# Altium PCB Pcb.PcbDoc (part 1 of 2)
Units mm, origin at the board's own origin, x right, y up, seen from the top; angles counter-clockwise.
Board outline 99.85 x 75.77 mm, 2 copper layers (Top Layer, Bottom Layer); 30 components, 145 nets, 485 pads, 129 vias.
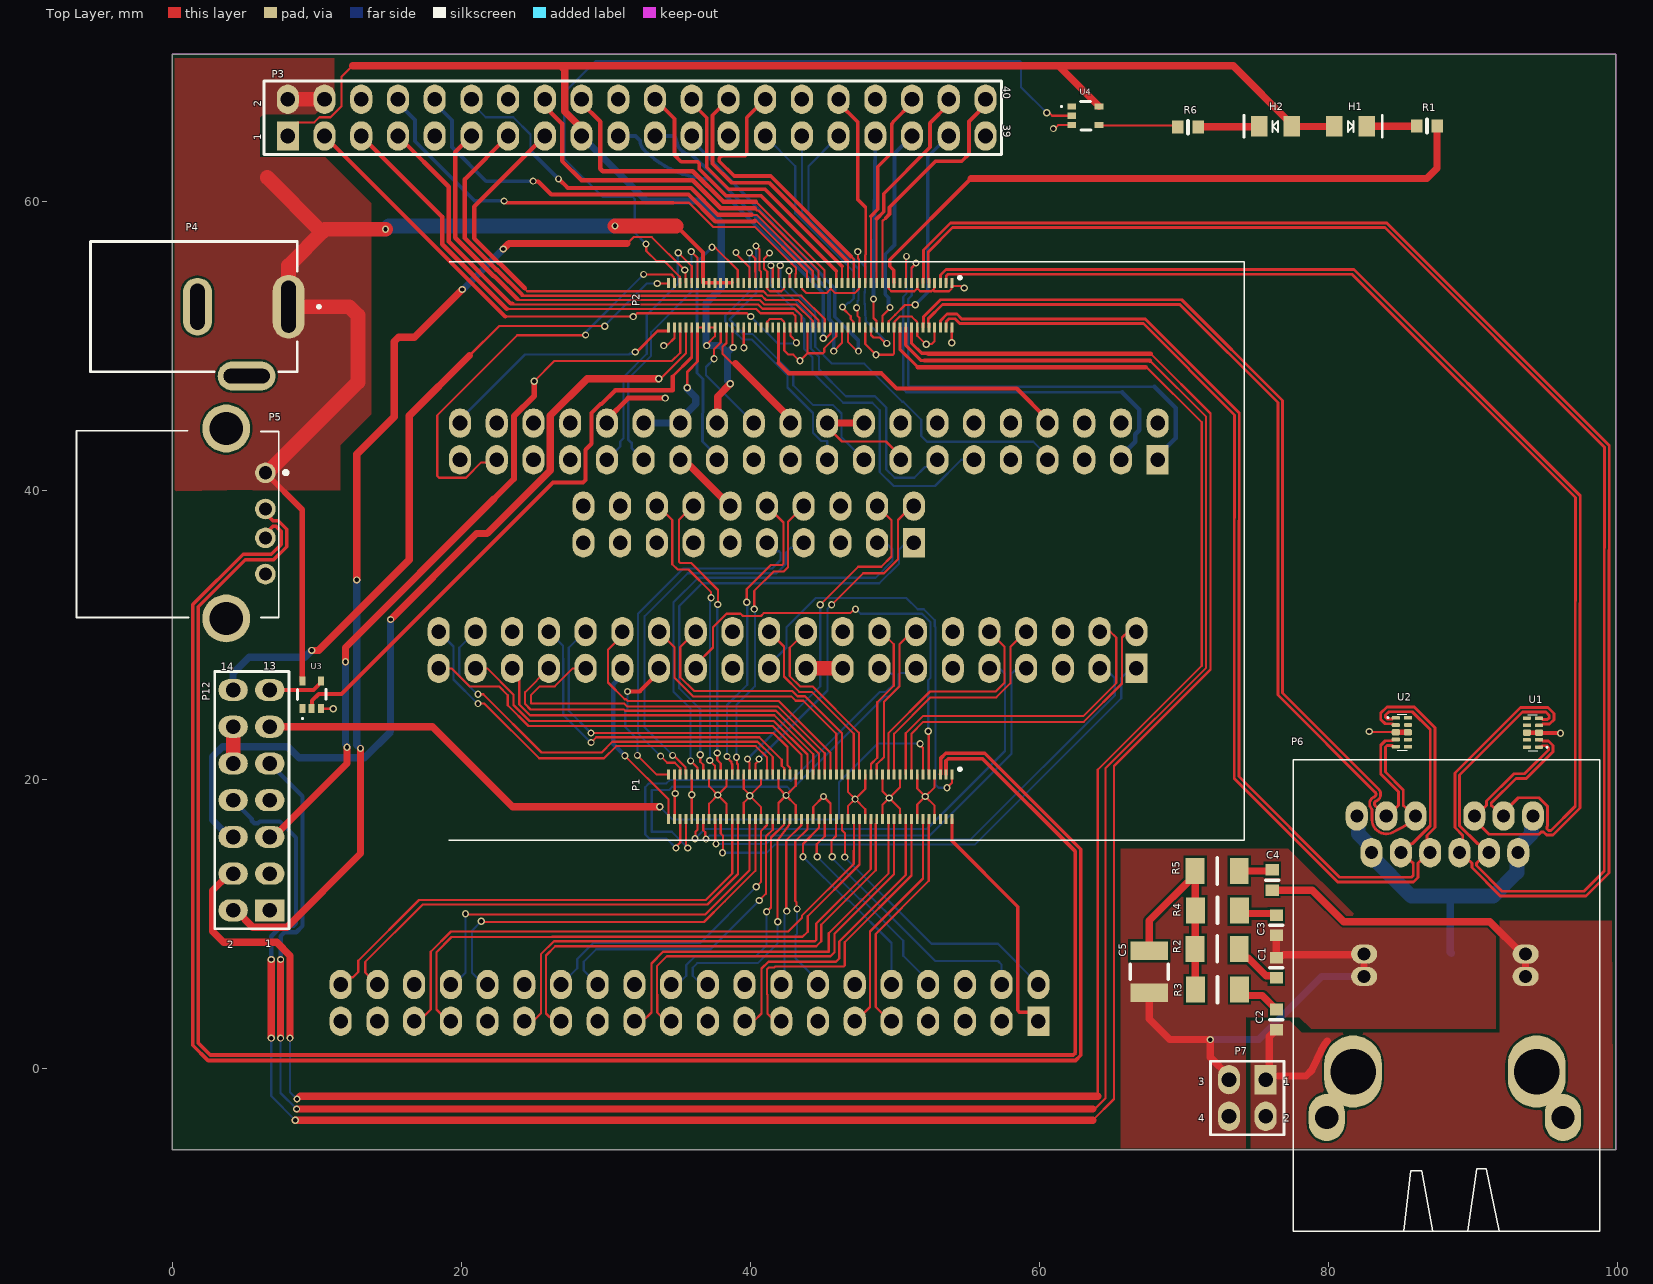
[diagram p0: Top Layer view]
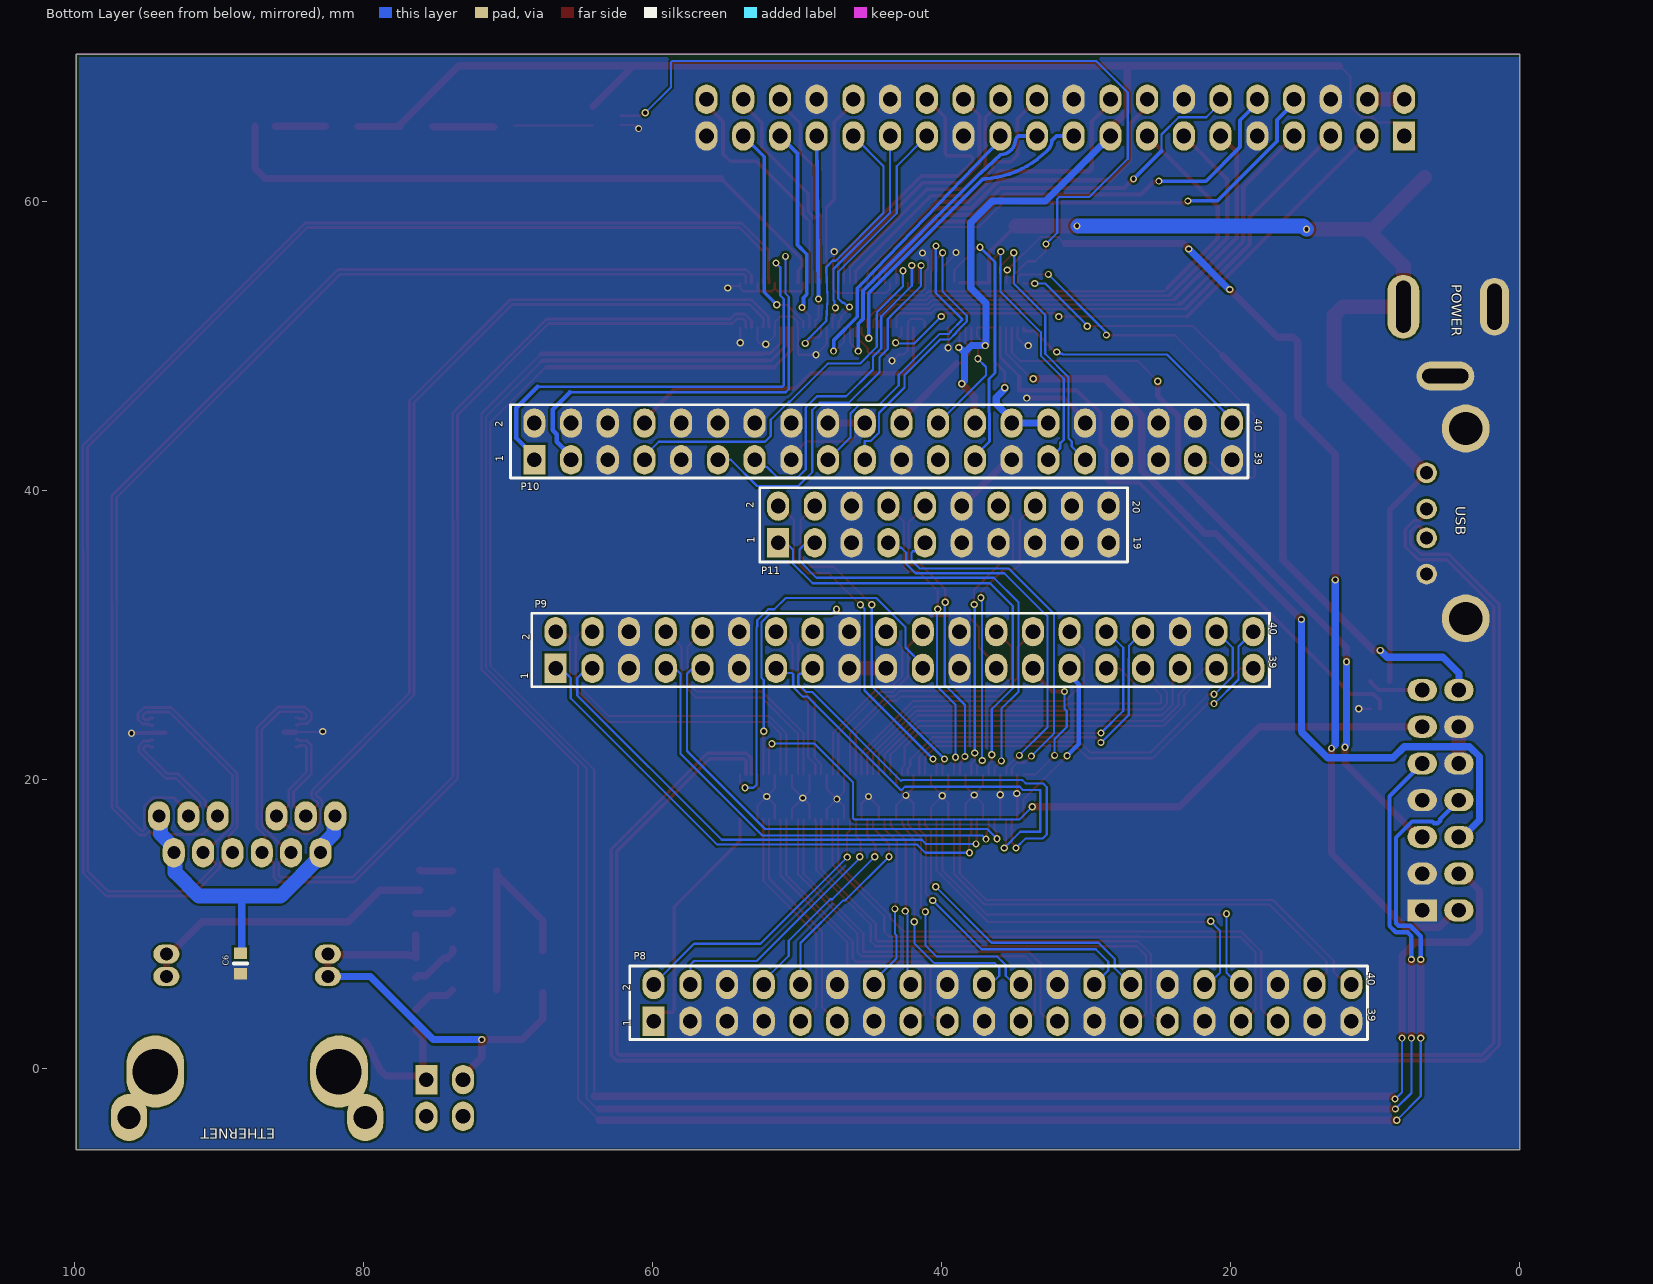
[diagram p1: Bottom Layer view, seen from below]
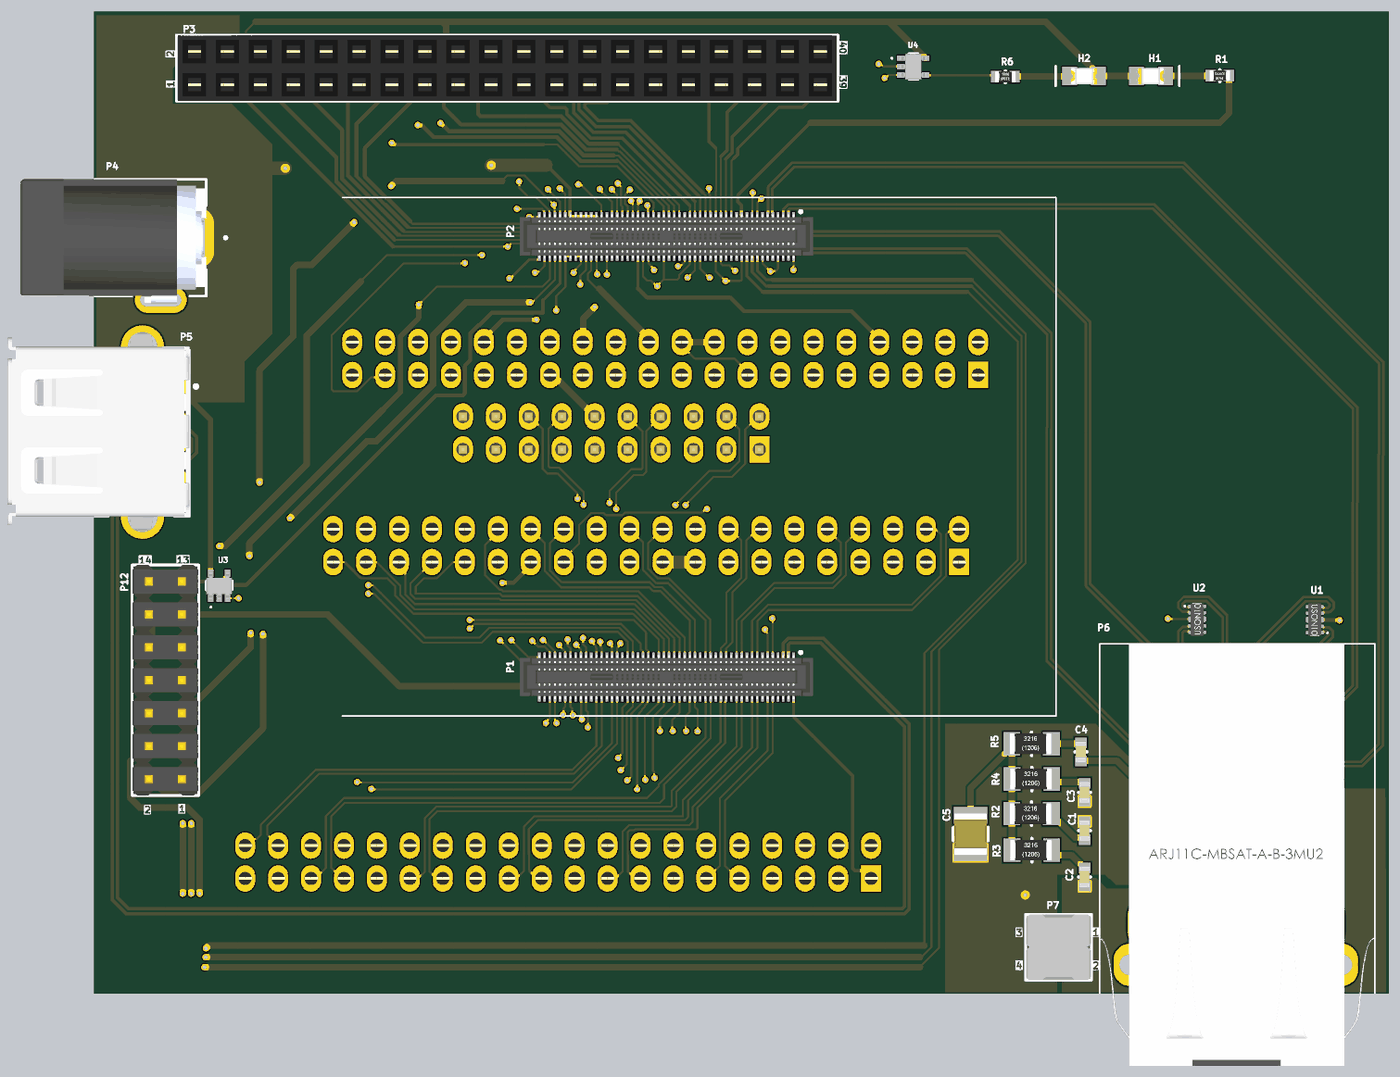
[diagram p3: 3D render of the assembled board from above, using the file's embedded part models]
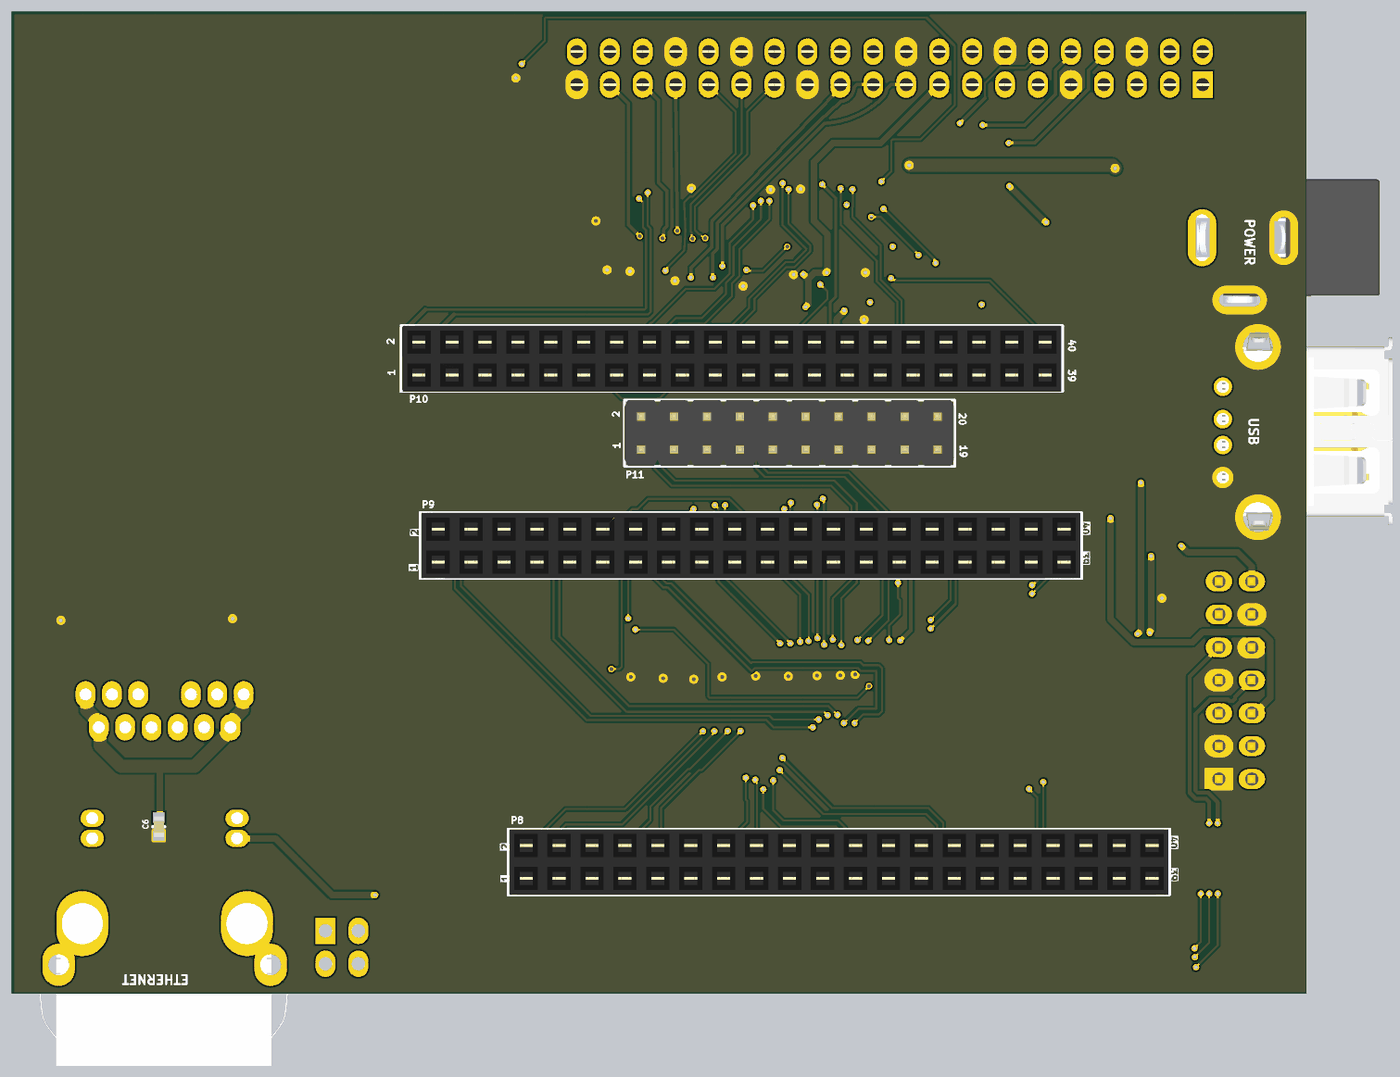
[diagram p4: 3D render of the assembled board from below, using the file's embedded part models]

## Layer stack, top to bottom
Top Solder: solder mask 0.0102, Solder Resist, Dk 3.5
Top Layer: signal copper 0.0356
Dielectric 1: dielectric 0.32, FR-4, Dk 4.8
Bottom Layer: signal copper 0.0356
Bottom Solder: solder mask 0.0102, Solder Resist, Dk 3.5

## Board outline
0,-5.588 0,70.18 99.847,70.18 99.847,-5.588

## Design rules (kind name [scope] priority, off if disabled: settings)
Clearance Clearance_usb [InDifferentialPairClass('diff')] p1: gap=0.125 ignorepadtopadclearanceinfootprint=FALSE except(0.152: THPad-Poly)
Clearance [All] p2: gap=0.152 ignorepadtopadclearanceinfootprint=TRUE
DiffPairsRouting DiffPairsRouting_usb [InDifferentialPair('D')] p1: maxlimit=0.127 minlimit=0.127 mostfreqgap=0.127 toplayer_minwidth=0.25 toplayer_maxwidth=0.25 toplayer_prefwidth=0.25 bottomlayer_minwidth=0.25 bottomlayer_maxwidth=0.25 bottomlayer_prefwidth=0.25 impedanceprofiledriven=TRUE impedanceprofileid={9463AF22-0BF9-44EA-9638-EB2DFFD5C69C} impedanceprofilevalue=90.000000 maxuncoupledlength=12.7
DiffPairsRouting DiffPairsRouting_ethernet [InDifferentialPairClass('ethernet')] p2: maxlimit=0.127 minlimit=0.127 mostfreqgap=0.127 toplayer_minwidth=0.197 toplayer_maxwidth=0.197 toplayer_prefwidth=0.197 bottomlayer_minwidth=0.197 bottomlayer_maxwidth=0.197 bottomlayer_prefwidth=0.197 impedanceprofiledriven=TRUE impedanceprofileid={E162DEC5-CC7A-4FA3-93E3-F4AE567A6B02} impedanceprofilevalue=100.000000 maxuncoupledlength=12.7
DiffPairsRouting [All] p3: maxlimit=0.254 minlimit=0.254 mostfreqgap=0.254 toplayer_minwidth=0.381 toplayer_maxwidth=0.381 toplayer_prefwidth=0.381 bottomlayer_minwidth=0.381 bottomlayer_maxwidth=0.381 bottomlayer_prefwidth=0.381 maxuncoupledlength=12.7
HoleSize [All] p1: absolutevalues=TRUE maxlimit=5 minlimit=0.025 maxpercent=80.000 minpercent=20.000
PolygonConnect PolygonConnect_15 [All vs IsNamedPolygon('5V_L01_P003')] p1: connectstyle=Direct reliefconductorwidth=0.254 reliefentries=4 polygonreliefangle="90 Angle" airgapwidth=0.254
PolygonConnect PolygonConnect_14 [All vs IsNamedPolygon('GND_T_L01_P001')] p2: connectstyle=Direct reliefconductorwidth=0.254 reliefentries=4 polygonreliefangle="90 Angle" airgapwidth=0.254
PolygonConnect PolygonConnect_13 [All vs IsNamedPolygon('GND_L02_P002')] p3: connectstyle=Direct reliefconductorwidth=0.254 reliefentries=4 polygonreliefangle="90 Angle" airgapwidth=0.254
PolygonConnect PolygonConnect_12 [All vs IsNamedPolygon('GND_T_L01_P001')] p4: connectstyle=Direct reliefconductorwidth=0.254 reliefentries=4 polygonreliefangle="90 Angle" airgapwidth=0.254
PolygonConnect PolygonConnect_11 [All vs IsNamedPolygon('GND_T_L01_P001')] p5: connectstyle=Direct reliefconductorwidth=0.254 reliefentries=4 polygonreliefangle="90 Angle" airgapwidth=0.254
PolygonConnect PolygonConnect_10 [All vs IsNamedPolygon('GND_T_L01_P001')] p6: connectstyle=Direct reliefconductorwidth=0.254 reliefentries=4 polygonreliefangle="90 Angle" airgapwidth=0.254
PolygonConnect PolygonConnect_9 [All vs IsNamedPolygon('GND_T_L01_P001')] p7: connectstyle=Direct reliefconductorwidth=0.254 reliefentries=4 polygonreliefangle="90 Angle" airgapwidth=0.254
PolygonConnect PolygonConnect_8 [All vs IsNamedPolygon('GND_T_L01_P001')] p8: connectstyle=Direct reliefconductorwidth=0.254 reliefentries=4 polygonreliefangle="90 Angle" airgapwidth=0.254
PolygonConnect PolygonConnect_7 [All vs IsNamedPolygon('VCC_L01_P000')] p9: connectstyle=Direct reliefconductorwidth=0.254 reliefentries=4 polygonreliefangle="90 Angle" airgapwidth=0.254
PolygonConnect PolygonConnect_6 [All vs IsNamedPolygon('GND_T_L01_P002')] p10: connectstyle=Relief reliefconductorwidth=0.254 reliefentries=4 polygonreliefangle="90 Angle" airgapwidth=0.254
PolygonConnect PolygonConnect_5 [All vs IsNamedPolygon('GND_L02_P003')] p11: connectstyle=Direct reliefconductorwidth=0.254 reliefentries=4 polygonreliefangle="90 Angle" airgapwidth=0.254
PolygonConnect PolygonConnect_4 [All vs IsNamedPolygon('GND_T_L01_P002')] p12: connectstyle=Direct reliefconductorwidth=0.254 reliefentries=4 polygonreliefangle="90 Angle" airgapwidth=0.254
PolygonConnect PolygonConnect_3 [All vs IsNamedPolygon('GND_T_L01_P002')] p13: thpad.connectstyle=Direct thpad.reliefconductorwidth=0.254 thpad.reliefentries=4 thpad.polygonreliefangle="90 Angle" thpad.airgapwidth=0.254 smdpad.connectstyle=Relief smdpad.reliefconductorwidth=0.254 smdpad.reliefentries=4 smdpad.polygonreliefangle="90 Angle" smdpad.airgapwidth=0.254 via.connectstyle=Relief via.reliefconductorwidth=0.254 via.reliefentries=4 via.polygonreliefangle="90 Angle" via.airgapwidth=0.254
PolygonConnect PolygonConnect_2 [All vs IsNamedPolygon('GND_T_L01_P002')] p14: thpad.connectstyle=NoConnect thpad.reliefconductorwidth=0.254 thpad.reliefentries=4 thpad.polygonreliefangle="90 Angle" thpad.airgapwidth=0.254 smdpad.connectstyle=Relief smdpad.reliefconductorwidth=0.254 smdpad.reliefentries=4 smdpad.polygonreliefangle="90 Angle" smdpad.airgapwidth=0.254 via.connectstyle=Relief via.reliefconductorwidth=0.254 via.reliefentries=4 via.polygonreliefangle="90 Angle" via.airgapwidth=0.254
PolygonConnect PolygonConnect_1 [All vs IsNamedPolygon('VCC_L01_P000')] p15: connectstyle=Direct reliefconductorwidth=0.254 reliefentries=4 polygonreliefangle="90 Angle" airgapwidth=0.254
PolygonConnect [All] p16: connectstyle=Relief reliefconductorwidth=0.254 reliefentries=4 polygonreliefangle="90 Angle" airgapwidth=0.254
RoutingVias [All] p1: holewidth=0.3 width=0.5 viastyle="Through Hole" minholewidth=0.3 minwidth=0.5 maxholewidth=0.3 maxwidth=0.5
SolderMaskExpansion [All] p1: expansion=0.102 istentingtop=FALSE
SupplyNets "Schematic Supply Nets_3" [InNet('5V')] p1: voltage=0.000
SupplyNets "Schematic Supply Nets_2" [InNet('3V3')] p2: voltage=0.000
SupplyNets "Schematic Supply Nets_1" [InNet('GND_T')] p3: voltage=0.000
SupplyNets "Schematic Supply Nets" [InNet('GND')] p4: voltage=0.000
UnRoutedNet [All] p1: checkbadconnections=TRUE
Width [All] p1: maxlimit=1.016 minlimit=0.152 preferedwidth=0.5
27 further rules are at their usual default settings.

## Classes and differential pairs
differential pair class ethernet: D1 D2 D3 D4
differential pair class diff: D D1 D2 D3 D4
differential pair D4: +D4_P -D4_N
differential pair D3: +D3_P -D3_N
differential pair D2: +D2_P -D2_N
differential pair D1: +D1_P -D1_N
differential pair D: +D_P -D_N

## Components (designator, comment, footprint, x,y, rotation, side; value= is the part's Value field where it differs from the comment)
C1 "12nF" CC1608-0603L 76.378,7.696 r270 top value="12 nF"
C2 "12nF" CC1608-0603L 76.378,2.715 r90 top value="12 nF"
C3 "12nF" CC1608-0603L 76.378,9.243 r90 top value="12 nF"
C4 "12nF" CC1608-0603L 76.098,12.367 r90 top value="12 nF"
C5 "1000pF" CC3225-1210L 67.589,8.179 r270 top
C6 "100nF" CC1608-0603L 88.494,6.601 r90 bottom
H1 "LED" LED0805 80.391,65.202 r0 top
H2 "LED" LED0805 77.445,65.202 r180 top
P1 "Raspberry Pi CM4 Pins(100-200)" (2)HRS_DF40HC(3.0)-100DS-0.4P(2) 44.143,18.837 r180 top
P2 "Raspberry Pi CM4 Pins(1-100)" "HRS_DF40HC(3.0)-100DS-0.4P - duplicate" 44.143,52.837 r180 top locked
P3 "CONNECTOR, 2x20" HDR_FEMALE_2.54MM_2x20_40P 8.001,64.541 r180 top locked
P4 "CONNECTOR_BARREL_JACK" PowerJack_GCT_DCJ200-10-A-XX-K_REVA 1.503,52.73 r270 top
P5 "61400416021" 61400416021 3.742,44.305 r270 top
P6 "ARJ-146" ARJ-146 88.039,7.07 r0 top locked
P7 "CONNECTOR, 2x2, 4P" HDR_MALE_2X2_4P_2.54MM_180 75.641,-0.737 r0 top
P8 "CONNECTOR, 2x20" HDR_FEMALE_2.54MM_2x20_40P 59.919,3.302 r0 bottom
P9 "CONNECTOR, 2x20" HDR_FEMALE_2.54MM_2x20_40P 66.7,27.711 r0 bottom
P10 "CONNECTOR, 2x20" HDR_FEMALE_2.54MM_2x20_40P 68.174,42.139 r0 bottom
P11 "CONNECTOR, 2x10, 20P" HDR_MALE_2X10_20P_2.54MM_180 51.308,36.398 r0 bottom
P12 "CONNECTOR, 2x7, 14P" HDR_MALE_2X7_14P_2.54MM_180 6.756,10.973 r270 top locked
R1 "1k" CR1608-0603L 87.503,65.227 r180 top
R2 "75R" CR3216-1206l 70.764,8.306 r0 top
R3 "75R" CR3216-1206l 70.79,5.486 r0 top
R4 "75R" CR3216-1206l 70.79,10.973 r0 top
R5 "75R" CR3216-1206l 70.764,13.691 r0 top
R6 "1k" CR1608-0603L 69.571,65.151 r0 top
U1 "TPD4EUSB30" USON50P250X55-10N 94.132,23.266 r180 top
U2 "TPD4EUSB30" USON50P250X55-10N 85.065,23.292 r0 top
U3 "74LVC1G07SE-7" SOT35365P215X100-5N 9.652,25.883 r90 top
U4 "74LVC1G07SE-7" SOT35365P215X100-5N 63.17,65.938 r0 top

## Footprints (in the part's own frame and the unit in brackets; to place one, negate y for a bottom-side part, rotate by r counter-clockwise, add the part's x,y. Pads: shape width x height; smd on the part's side, far side on the other; paste and mask are expansions set on the pad)
61400416021 [mm] "CONNECTOR ,                       USB 2.0 ,                             TYPE-A"
  round 1.428 hole 0.92: 1(3.07,2.71) 2(5.57,2.71) 3(7.57,2.71) 4(10.07,2.71)
  round 3.316 hole 2.3: 4(0,0) 4(13.14,0)
  silkscreen extent 0.15,-10.36 13.08,4.24, body extent -1.12,-10.36 14.18,3.64, height 7.6
(2)HRS_DF40HC(3.0)-100DS-0.4P(2) [mm]
  rect 0.2x0.7 smd: 101(-9.8,-1.54) 102(-9.8,1.54) 103(-9.4,-1.54) 104(-9.4,1.54) 105(-9,-1.54) 106(-9,1.54) 107(-8.6,-1.54) 108(-8.6,1.54) 109(-8.2,-1.54) 110(-8.2,1.54) 111(-7.8,-1.54) 112(-7.8,1.54) 113(-7.4,-1.54) 114(-7.4,1.54) 115(-7,-1.54) 116(-7,1.54) 117(-6.6,-1.54) 118(-6.6,1.54) 119(-6.2,-1.54) 120(-6.2,1.54) 121(-5.8,-1.54) 122(-5.8,1.54) 123(-5.4,-1.54) 124(-5.4,1.54) 125(-5,-1.54) 126(-5,1.54) 127(-4.6,-1.54) 128(-4.6,1.54) 129(-4.2,-1.54) 130(-4.2,1.54) 131(-3.8,-1.54) 132(-3.8,1.54) 133(-3.4,-1.54) 134(-3.4,1.54) 135(-3,-1.54) 136(-3,1.54) 137(-2.6,-1.54) 138(-2.6,1.54) 139(-2.2,-1.54) 140(-2.2,1.54) 141(-1.8,-1.54) 142(-1.8,1.54) 143(-1.4,-1.54) 144(-1.4,1.54) 145(-1,-1.54) 146(-1,1.54) 147(-0.6,-1.54) 148(-0.6,1.54) 149(-0.2,-1.54) 150(-0.2,1.54) 151(0.2,-1.54) 152(0.2,1.54) 153(0.6,-1.54) 154(0.6,1.54) 155(1,-1.54) 156(1,1.54) 157(1.4,-1.54) 158(1.4,1.54) 159(1.8,-1.54) 160(1.8,1.54) 161(2.2,-1.54) 162(2.2,1.54) 163(2.6,-1.54) 164(2.6,1.54) 165(3,-1.54) 166(3,1.54) 167(3.4,-1.54) 168(3.4,1.54) 169(3.8,-1.54) 170(3.8,1.54) 171(4.2,-1.54) 172(4.2,1.54) 173(4.6,-1.54) 174(4.6,1.54) 175(5,-1.54) 176(5,1.54) 177(5.4,-1.54) 178(5.4,1.54) 179(5.8,-1.54) 180(5.8,1.54) 181(6.2,-1.54) 182(6.2,1.54) 183(6.6,-1.54) 184(6.6,1.54) 185(7,-1.54) 186(7,1.54) 187(7.4,-1.54) 188(7.4,1.54) 189(7.8,-1.54) 190(7.8,1.54) 191(8.2,-1.54) 192(8.2,1.54) 193(8.6,-1.54) 194(8.6,1.54) 195(9,-1.54) 196(9,1.54) 197(9.4,-1.54) 198(9.4,1.54) 199(9.8,-1.54) 200(9.8,1.54)
  silkscreen extent -10.45,-2 -10.25,-1.8, body extent -11.3,-1.69 11.3,1.69, height 3
ARJ-146 [mm] "Ethernet, RJ45 Connector , 16,60 mm x 32.60 mm"
  oval 1.524x2.032 hole 0.9: 1(5.075,7.89) 2(3.045,7.89) 3(1.015,7.89) 4(-1.015,7.89) 5(-3.045,7.89) 6(-5.075,7.89) 7(6.095,10.43) 8(4.065,10.43) 9(2.035,10.43) 10(-2.025,10.43) 11(-4.055,10.43) 12(-6.095,10.43)
  oval 1.8x1.324 hole 0.9: 13(5.585,0.88) 14(-5.585,0.88) 15(5.585,-0.67) 16(-5.585,-0.67)
  oval 2.5x3.25 hole 1.6: NC(-8.175,-10.43) NC(8.175,-10.43)
  oval 4x5 hole 3.15: NC(-6.35,-7.25)
  oval 4x5 hole 3.15 unplated: NC(6.35,-7.25)
  silkscreen extent -10.49,-18.3 10.72,14.34, body extent -10.52,-18.25 10.67,14.35, height 16.41
CC1608-0603L [mm] "Chip Capacitor, Body 1.6x0.8mm, IPC Low Density"
  rect 0.8x0.9 smd: 1(0,0) 2(1.4,0)
  silkscreen extent 0.7,-0.45 0.7,0.45, body extent -0.1,-0.4 1.5,0.4, height 0.78
CC3225-1210L [mm] "Chip Capacitor, Body 3.2x2.5mm, IPC Low Density"
  rect 1.3x2.6 smd: 1(0,0) 2(2.9,0)
  silkscreen extent 0.94,-1.32 1.96,1.32, body extent -0.15,-1.25 3.05,1.25, height 1.3
CR1608-0603L [mm] "Chip Resistor, Body 1.6x0.8mm, IPC Low Density"
  rect 0.8x0.9 smd: 1(0,0) 2(1.4,0)
  silkscreen extent 0.7,-0.45 0.7,0.45, body extent -0.08,-0.43 1.48,0.43, height 0.45
CR3216-1206l [mm] "Chip Resistor, Body 3.2 x 1.6 mm, IPC Low Density"
  rect 1.3x1.8 smd: 1(0,0) 2(3.048,0)
  silkscreen extent 1.52,-0.9 1.52,0.9, body extent -0.15,-0.8 3.05,0.8, height 0.55
HDR_FEMALE_2.54MM_2x20_40P [mil] "female header , 2,54MM, 2x20, 40P"
  rect 60x80 hole 40: 1(0,0)
  oval 60x80 hole 40: 2(0,-100) 3(-100,0) 4(-100,-100) 5(-200,0) 6(-200,-100) 7(-300,0) 8(-300,-100) 9(-400,0) 10(-400,-100) 11(-500,0) 12(-500,-100) 13(-600,0) 14(-600,-100) 15(-700,0) 16(-700,-100) 17(-800,0) 18(-800,-100) 19(-900,0) 20(-900,-100) 21(-1000,0) 22(-1000,-100) 23(-1100,0) 24(-1100,-100) 25(-1200,0) 26(-1200,-100) 27(-1300,0) 28(-1300,-100) 29(-1400,0) 30(-1400,-100) 31(-1500,0) 32(-1500,-100) 33(-1600,0) 34(-1600,-100) 35(-1700,0) 36(-1700,-100) 37(-1800,0) 38(-1800,-100) 39(-1900,0) 40(-1900,-100)
  silkscreen extent -1944,-150 65,50, body extent -1940,-150 60,50, height 315
HDR_MALE_2X2_4P_2.54MM_180 [mil] "Male Header, 4p, 2.54mm, 180 degree"
  rect 60x80 hole 40: 1(0,0)
  oval 60x80 hole 40: 2(0,-100) 3(-100,0) 4(-100,-100)
  silkscreen extent -150,-150 50,50, body extent -148,-150 48,50, height 327
HDR_MALE_2X7_14P_2.54MM_180 [mil] "Male Header, 14p, 2.54mm"
  rect 60x80 hole 40: 1(0,0)
  oval 60x80 hole 40: 2(0,-100) 3(-100,0) 4(-100,-100) 5(-200,0) 6(-200,-100) 7(-300,0) 8(-300,-100) 9(-400,0) 10(-400,-100) 11(-500,0) 12(-500,-100) 13(-600,0) 14(-600,-100)
  silkscreen extent -650,-150 50,52, body extent -650,-149 50,51, height 374
HDR_MALE_2X10_20P_2.54MM_180 [mil] "Male Header, 20p, 2.54mm, 180 degree"
  rect 60x80 hole 40: 1(0,0)
  oval 60x80 hole 40: 2(0,-100) 3(-100,0) 4(-100,-100) 5(-200,0) 6(-200,-100) 7(-300,0) 8(-300,-100) 9(-400,0) 10(-400,-100) 11(-500,0) 12(-500,-100) 13(-600,0) 14(-600,-100) 15(-700,0) 16(-700,-100) 17(-800,0) 18(-800,-100) 19(-900,0) 20(-900,-100)
  silkscreen extent -952,-150 50,52, body extent -950,-150 50,50, height 336
"HRS_DF40HC(3.0)-100DS-0.4P - duplicate" [mm]
  rect 0.2x0.7 smd: 1(-9.8,-1.54) 2(-9.8,1.54) 3(-9.4,-1.54) 4(-9.4,1.54) 5(-9,-1.54) 6(-9,1.54) 7(-8.6,-1.54) 8(-8.6,1.54) 9(-8.2,-1.54) 10(-8.2,1.54) 11(-7.8,-1.54) 12(-7.8,1.54) 13(-7.4,-1.54) 14(-7.4,1.54) 15(-7,-1.54) 16(-7,1.54) 17(-6.6,-1.54) 18(-6.6,1.54) 19(-6.2,-1.54) 20(-6.2,1.54) 21(-5.8,-1.54) 22(-5.8,1.54) 23(-5.4,-1.54) 24(-5.4,1.54) 25(-5,-1.54) 26(-5,1.54) 27(-4.6,-1.54) 28(-4.6,1.54) 29(-4.2,-1.54) 30(-4.2,1.54) 31(-3.8,-1.54) 32(-3.8,1.54) 33(-3.4,-1.54) 34(-3.4,1.54) 35(-3,-1.54) 36(-3,1.54) 37(-2.6,-1.54) 38(-2.6,1.54) 39(-2.2,-1.54) 40(-2.2,1.54) 41(-1.8,-1.54) 42(-1.8,1.54) 43(-1.4,-1.54) 44(-1.4,1.54) 45(-1,-1.54) 46(-1,1.54) 47(-0.6,-1.54) 48(-0.6,1.54) 49(-0.2,-1.54) 50(-0.2,1.54) 51(0.2,-1.54) 52(0.2,1.54) 53(0.6,-1.54) 54(0.6,1.54) 55(1,-1.54) 56(1,1.54) 57(1.4,-1.54) 58(1.4,1.54) 59(1.8,-1.54) 60(1.8,1.54) 61(2.2,-1.54) 62(2.2,1.54) 63(2.6,-1.54) 64(2.6,1.54) 65(3,-1.54) 66(3,1.54) 67(3.4,-1.54) 68(3.4,1.54) 69(3.8,-1.54) 70(3.8,1.54) 71(4.2,-1.54) 72(4.2,1.54) 73(4.6,-1.54) 74(4.6,1.54) 75(5,-1.54) 76(5,1.54) 77(5.4,-1.54) 78(5.4,1.54) 79(5.8,-1.54) 80(5.8,1.54) 81(6.2,-1.54) 82(6.2,1.54) 83(6.6,-1.54) 84(6.6,1.54) 85(7,-1.54) 86(7,1.54) 87(7.4,-1.54) 88(7.4,1.54) 89(7.8,-1.54) 90(7.8,1.54) 91(8.2,-1.54) 92(8.2,1.54) 93(8.6,-1.54) 94(8.6,1.54) 95(9,-1.54) 96(9,1.54) 97(9.4,-1.54) 98(9.4,1.54) 99(9.8,-1.54) 100(9.8,1.54)
  silkscreen extent -10.45,-2 -10.25,-1.8, body extent -11.3,-1.69 11.3,1.69, height 3
LED0805 [mil]
  rect 45x56 smd: 1(0,0) 2(87.87,0)
  silkscreen extent 37,-30 130,30, body extent 4,-25 82,25, height 43
PowerJack_GCT_DCJ200-10-A-XX-K_REVA [mm] "Power Jack"
  oval 4.4x2.2 hole 1 slot 3.6 at 0 deg: 1(0,6.55)
  oval 4x2 hole 1 slot 3.2 at 0 deg: 2(0,0.25)
  oval 2x4 hole 1 slot 3.2 at 90 deg: 3(4.8,3.65)
  silkscreen extent -4.5,-7.15 4.5,8.75, body extent -4.5,-7.15 5.05,7.15, height 11
SOT35365P215X100-5N [mm] "SOT353 , 2,15mm x 2,10 mm , 5N"
  rect 0.6x0.42 smd: 1(-0.95,0.65) 2(-0.95,0) 3(-0.95,-0.65) 4(0.95,-0.65) 5(0.95,0.65)
  silkscreen extent -1.68,-0.99 0.38,0.99, body extent -1.05,-1 1.05,1, height 0.9
USON50P250X55-10N [mm] "USON-10 , 2.5mm * 1mm , 0.5 pitch"
  rrect50% 0.565x0.25 smd mask+0.05: 1(-0.417,1) 2(-0.417,0.5) 4(-0.417,-0.5) 5(-0.417,-1) 6(0.417,-1) 7(0.417,-0.508) 9(0.417,0.5) 10(0.417,1)
  rrect50% 0.565x0.45 smd mask+0.05: 3(-0.417,0) 3(0.417,0)
  silkscreen extent -1.02,-1.24 0.36,1.24, body extent -0.5,-1.26 0.51,1.24, height 0.55

## Part data
C1 C2 C3 C4: library part "CAPACITOR NON-POL", "CAP CER 12nF 100V X7R 0603", Manufacturer="KYOCERA AVX", Manufacturer Part Number=06031C123KAT2A, Voltage=100V, ComponentLink1Description="Supplier Link", ComponentLink1URL=https://www.digikey.com/en/products/detail/kyocera-avx/06031C123KAT2A/1598683, Supplier=Digikey
C5: library part "CAPACITOR NON-POL", "CAP CER 1000pF 2KV X7R 1210", Manufacturer="Johanson Dielectrics Inc.", Manufacturer Part Number=VPDF202W102K1GV001E, Voltage="2 KV", ComponentLink1Description="Supplier Link", ComponentLink1URL=https://www.digikey.com/en/products/detail/johanson-dielectrics-inc/VPDF202W102K1GV001E/1556362, Supplier=Digikey
C6: library part "CAPACITOR NON-POL", "MLCC (1608) 0603 100nF 50VDC ±10% X7R", Manufacturer=YAGEO, Manufacturer Part Number=CC0603KRX7R9BB104, Voltage=50V, ComponentLink1Description="Supplier Link", ComponentLink1URL=https://www.ozdisan.com/p/smt-smd-ve-mlcc-kapasitorler-184/yageo-cc0603krx7r9bb104-476015, Supplier=Ozdisan
H1: "LED SMD 0805 GREEN 18-45mcd 140° WATER CLEAR", Manufacturer=EVERLIGHT, Manufacturer Part Number=17-21/G6C-FM1N2B/4T, ComponentLink1Description="Supplier Link", ComponentLink1URL=https://www.ozdisan.com/p/sinyal-ledler-tek-renkli-361/everlight-17-21-g6c-fm1n2b-4t-745079, Supplier=Ozdisan
H2: "LED SMD 0805 RED 45~112mcd 120C", Manufacturer=EVERLIGHT, Manufacturer Part Number=17-21/R6C-AP1Q2L/4T, ComponentLink1Description="Supplier Link", ComponentLink1URL=https://www.ozdisan.com/p/LED-Signal-Color-361/everlight-17-21-r6c-ap1q2l-4t-752951?srsltid=AfmBOoqZqmeJ3FM6HWEOiGvNNT3e6XCAh5WM331N7RK8NO8n97aDRcQ0, Supplier=Ozdisan
P1 P2: "Connector , 2*50", Manufacturer="Hirose Electric", Manufacturer Part Number=DF40HC(3.0)-100DS-0.4V(51), ComponentLink1Description="Supplier Link", ComponentLink1URL=https://www.digikey.com/en/products/detail/hirose-electric-co-ltd/DF40HC-3-0-100DS-0-4V-51/4282911, Supplier=Digikey
P3 P8 P9 P10: "CONNECTOR, 2x20, 40P", Manufacturer="Würth Elektronik", Manufacturer Part Number=61304021821, ComponentLink1Description="Supplier Link", ComponentLink1URL=https://www.digikey.com/en/products/detail/w%C3%BCrth-elektronik/61304021821/16608657?s=N4IgTCBcDaIGwEYDMAGALCsCAcWQF0BfIA, Supplier=Digikey
P4: "Power Barrel Connector Jack 2.05mm ID (0.081\"), 5.50mm OD (0.217\") Through Hole, Right Angle", Current Rating=5A, Manufacturer=GCT, Manufacturer Part Number=DCJ200-10-A-K1-K, Supplier Part Number=2073-DCJ200-10-A-K1-K-ND, Voltage Rating="20V DC", ComponentLink1Description="Supplier Link", ComponentLink1URL=https://www.digikey.com/en/products/detail/gct/DCJ200-10-A-K1-K/9859579, Supplier=Digikey
P5: "USB-A (USB TYPE-A) USB 2.0 Receptacle Connector 4 Position Through Hole, Right Angle", Manufacturer="Würth Elektronik", Supplier Part Number=732-2106-ND, ComponentLink1Description="Supplier Link", ComponentLink1URL=https://www.digikey.com/en/products/detail/w%C3%BCrth-elektronik/61400416021/2060602, ComponentLink2Description="Datasheet Link", ComponentLink2URL=https://www.we-online.com/components/products/datasheet/61400416021.pdf, Manufacturer Part Number=61400416021, Supplier=Digikey
P6: "1 Port RJ45 Through Hole 10/100/1000 Base-T, AutoMDIX, Power over Ethernet (PoE)", Manufacturer="Abracon LLC", Supplier Part Number=535-12248-ND, ComponentLink1Description="Supplier Link", ComponentLink1URL=https://www.digikey.com/en/products/detail/abracon-llc/ARJ-146/4215225, Manufacturer Part Number=ARJ-146, Supplier=Digikey
P7: "Male Header, 2x2, 4P , 2,54mm", Manufacturer="KLS ELECTRONIC", Manufacturer Part Number=L-KLS1-207-2-04-S, ComponentLink1Description="Supplier Link", ComponentLink1URL=https://www.ozdisan.com/p/pin-headerlar-293/kls-electronic-l-kls1-207-2-04-s-479018, Supplier=Ozdisan
P11: Manufacturer=CONNFLY, Manufacturer Part Number=DS1021-2X10SF11-B, ComponentLink1Description="Supplier Link", ComponentLink1URL=https://www.ozdisan.com/p/pin-headerlar-293/connfly-ds1021-2x10sf11-b-517240, Supplier=Ozdisan
P12: Manufacturer=CONNFLY, Manufacturer Part Number=DS1004-2X7F14, ComponentLink1Description="Supplier Link", ComponentLink1URL=https://www.ozdisan.com/p/pin-headerlar-293/connfly-ds1004-2x7f14-513991, Supplier=Ozdisan
R1 R6: library part RESISTOR, "RES.(1608) 0603 1K Ohms 5% 1/10W 100PPM SMT", Manufacturer=YAGEO, Manufacturer Part Number=RC0603JR-071KL, Voltage=75V, ComponentLink1Description="Supplier Link", ComponentLink1URL=https://www.ozdisan.com/p/smt-smd-ve-cip-direncler-194/royalohm-1206s4j0750t5e-344157, Supplier=Ozdisan
R2 R3 R4 R5: library part RESISTOR, "RES.(3216) 1206 75 Ohms 5% 1/4W-S 200PPM", Manufacturer=ROYALOHM, Manufacturer Part Number=1206S4J0750T5E, Voltage=200V, ComponentLink1Description="Supplier Link", ComponentLink1URL=https://www.ozdisan.com/p/smt-smd-ve-cip-direncler-194/royalohm-1206s4j0750t5e-344157, Supplier=Ozdisan
U1 U2: "TVS DIODE 5.5VWM 8VC 10USON", Manufacturer="Texas Instruments", Manufacturer Part Number=TPD4EUSB30DQAR, ComponentLink1Description="Supplier Link", ComponentLink1URL=https://www.digikey.com/en/products/detail/texas-instruments/TPD4EUSB30DQAR/2503665?gclsrc=aw.ds&gad_source=1&gad_campaignid=21513785267&gbraid=0AAAAADrbLlhmse0gU-719uq6pgEek2vGd&gclid=Cj0KCQiA5uDIBhDAARIsAOxj0CHcWiQOA9y2CuA4wFcjfeBFD6P3JbBPSUPRAe0RB6YW1ubCTJxUprkaAkftEALw_wcB, Supplier=Digikey
U3 U4: "IC BUF NON-INVERT 5.5V", Manufacturer=DIODES, ComponentLink1Description="Supplier Link", ComponentLink1URL=https://www.ozdisan.com/p/Buffers-Drivers-Receivers-and-Transceivers-244/diodes-74lvc1g07se-7-702869?srsltid=AfmBOooBFdMJnXkx3yepfLdhY9BiT5jz5IJDo2REhXwX1lrIa2-bRsec, Manufacturer Part Number=74LVC1G07SE-7, Supplier=Ozdisan

## Via types
v1: diameter 0.5, hole 0.3, Top Layer to Bottom Layer, 129 vias

## Nets (pads, with @x,y where several pads share a name; then routed paths per layer and width w, separated by ;. In a path a pad name is that pad's centre, name@x,y a point inside that pad or via, vN(x,y) a via of type N, cw(c..) or ccw(c..) an arc to the next point about the centre after c; other vN are vias at no path point)
1.8V: P2.88 P2.90 P10.28 P10.30 | length 10.5
  Top Layer w0.152: P2.90@36.343,51.297 P2.88@36.743,51.297
  Top Layer w0.197: v1(35.636,47.117) 35.636,48.223 36.343,48.93 P2.90@36.343,51.297
  Bottom Layer w0.5: P10.30@32.614,44.679 P10.28@35.154,44.679 35.154,44.933 36.223,46.002 36.223,46.449 35.636,47.036 v1(35.636,47.117)
3V3: H1.1 H2.1 P2.78 P2.84 P2.86 P3.1 P3.17 P10.26 U4.5 | length 118.8
  Top Layer w0.152: P3.1@8.001,64.541 8.001,64.795 8.687,65.481 9.827,65.481 10.183,65.837 10.951,65.837 11.711,66.598 11.711,68.633 12.471,69.393 ; v1(36.982,50.038) 36.982,50.116 37.543,50.677 P2.84@37.543,51.297 P2.86@37.143,51.297 ; P2.78@38.743,51.297 38.767,51.273 38.767,49.955 v1(38.811,49.911)
  Top Layer w0.5: 12.471,69.393 26.873,69.393 ; P3.17@28.321,64.541 28.321,65.068 27.157,66.232 27.157,69.109 26.873,69.393 ; P10.26@37.694,44.679 37.743,44.728 37.743,46.526 v1(38.611,47.394) ; U4.5@64.12,66.588 64.11,66.588 64.03,66.668 64.03,66.678 61.315,69.393 ; H1.1@80.391,65.202 H2.1@77.445,65.202 77.445,65.341 73.393,69.393 61.315,69.393 ; 26.873,69.393 61.315,69.393
  Bottom Layer w0.5: P3.17@28.321,64.541 32.817,60.046 36.5,60.046 37.991,58.554 37.991,54.031 36.932,52.971 36.932,50.089 v1(36.982,50.038) 37.927,50.038 38.374,49.59 ; v1(38.611,47.394) 38.41,47.595 38.41,49.555 v1@38.766,49.911
5V: P2.77 P2.79 P2.81 P2.83 P2.85 P2.87 P3.2 P3.4 P4.1 P5.1 U3.5 | length 79.4
  Top Layer w0.25: 34.849,58.318 34.883,58.318 36.72,56.481 36.72,54.4 P2.87@36.743,54.377 P2.85@37.143,54.377 P2.83@37.543,54.377 P2.81@37.943,54.377 P2.79@38.343,54.377 P2.77@38.743,54.377
  Top Layer w0.4: P5.1@6.452,41.235 9.002,38.685 U3.5@9.002,26.833
  Top Layer w1.016: 6.579,61.671 10.363,57.887 ; P5.1@6.604,41.438 6.793,41.438 12.852,47.498 12.852,52.135 12.257,52.73 P4.1@8.053,52.73 8.053,55.576 10.566,58.09 v1(14.757,58.09) ; P3.2@8.001,66.965 P3.2@8.001,67.081 P3.4@10.541,67.081 ; v1(30.632,58.318) 34.849,58.318
  Bottom Layer w1.016: v1(14.757,58.09) 14.986,58.318 v1@30.564,58.318
AIN0: P2.96 P12.5 | length 52
  Top Layer w0.152: v1(25.044,47.574) 26.438,48.968 34.566,48.968 35.143,49.545 P2.96@35.143,51.297
  Top Layer w0.4: 22.25,39.421 23.638,40.808 23.638,45.152 25.044,46.559 v1(25.044,47.574)
  Top Layer w0.5: P12.5@6.756,16.053 7.01,16.053 12.09,21.133 v1(12.09,22.25) ; v1(11.989,28.169) 11.989,29.159 22.25,39.421
  Bottom Layer w0.5: v1(11.989,28.169) 11.989,22.454 12.09,22.352 v1(12.09,22.25)
AIN1: P2.94 P12.6 | length 59.8
  Top Layer w0.152: v1(33.655,47.752) 33.722,47.819 33.847,47.819 35.543,49.515 P2.94@35.543,51.297
  Top Layer w0.5: v1(15.113,31.09) 21.057,37.033 21.788,37.033 26.158,41.402 26.158,45.203 28.707,47.752 v1(33.655,47.752)
  Bottom Layer w0.5: P12.6@4.216,16.053 3.962,16.053 2.798,17.217 2.798,21.615 3.48,22.297 8.003,22.297 8.778,21.522 13.3,21.522 15.113,23.335 v1(15.113,31.09)
BT_nDisable: P2.91 P10.31 | length 18.9
  Top Layer w0.152: v1(35.001,56.466) 35.943,55.524 P2.91@35.943,54.377
  Bottom Layer w0.152: 31.222,44.882 31.222,47.86 32.829,49.467 32.829,52.158 35.001,54.331 35.001,55.052 34.98,55.072 34.98,56.445 v1(35.001,56.466)
  Bottom Layer w0.17: P10.31@30.074,42.139 30.996,43.061 30.996,43.403 31.222,43.628 31.222,44.882
Camera_GPIO: P2.97 P10.37 | length 29.9
  Top Layer w0.152: P10.37@22.454,42.139 22.276,41.961 21.39,41.961 20.324,40.895 18.465,40.895 18.339,41.021 18.339,45.212 23.876,50.749 28.575,50.749 v1(28.6,50.775) ; v1(32.614,54.966) 32.624,54.955 34.537,54.955 34.719,54.773 34.719,54.401 P2.97@34.743,54.377
  Bottom Layer w0.152: v1(28.6,50.775) 28.667,50.841 28.667,51.019 v1(32.614,54.966)
D1_N: P2.10 P6.10 U2.5 | length 70.5
  Top Layer w0.197: P2.10@52.343,51.297 52.343,51.547 52.305,51.585 52.305,51.897 53.29,52.883 69.704,52.883 76.486,46.101 76.486,25.875 83.217,19.144 cw(c83.077,19.005) 83.156,18.825 83.152,18.823 ccw(c83.359,18.345) 82.96,18.011 cw(c82.809,17.884) 83.005,17.863 ccw(c83.984,17.754) 82.999,17.754 82.999,17.246 ccw(c83.984,17.246) 84.447,16.376 85.909,17.153 ccw(c85.816,17.327) 85.955,17.187 86.014,17.246 P6.10@86.014,17.5 85.909,17.5 85.291,18.118 85.277,18.118 85.161,18.233 85.161,19.307 83.933,20.536 83.933,22.264 84.048,22.38 84.402,22.38 84.49,22.292 U2.5@84.647,22.292
D1_P: P2.12 P6.11 U2.4 | length 68.1
  Top Layer w0.197: P2.12@51.943,51.297 51.943,51.547 51.981,51.585 51.981,52.031 53.156,53.207 69.838,53.207 76.81,46.235 76.81,26.01 83.446,19.373 cw(c83.077,19.005) 83.285,18.528 83.281,18.526 ccw(c83.359,18.345) 83.208,18.219 ccw(c83.359,18.345) 83.251,18.181 83.984,17.697 P6.11@83.984,17.5 84.09,17.5 84.707,18.118 84.722,18.118 84.837,18.233 84.837,19.173 83.609,20.402 83.609,22.399 83.914,22.704 84.402,22.704 84.49,22.792 U2.4@84.647,22.792
D2_N: P2.6 P6.5 U2.1 | length 80.3
  Top Layer w0.197: P2.6@53.143,51.297 53.145,51.298 53.145,51.761 53.605,52.221 54.281,52.221 54.617,51.885 67.317,51.885 73.819,45.383 73.819,37.975 73.794,37.949 73.794,20.225 80.76,13.259 85.732,13.259 85.847,13.374 85.847,14.227 85.732,14.342 85.717,14.342 P6.5@85.1,14.96 ; U2.1@84.647,24.292 84.49,24.292 84.402,24.204 84.048,24.204 83.933,24.319 83.933,24.482 84.163,24.712 85.787,24.712 87.027,23.472 87.027,16.827 85.778,15.578 85.717,15.578 P6.5@85.1,14.96 ; P6.5@84.994,14.96 P6.5@85.1,14.96
D2_P: P2.4 P6.4 U2.2 | length 81.3
  Top Layer w0.197: P2.4@53.543,51.297 53.545,51.298 53.545,51.703 53.739,51.897 54.147,51.897 54.483,51.561 67.183,51.561 73.496,45.249 73.496,38.109 73.47,38.083 73.47,20.091 80.626,12.935 85.866,12.935 86.171,13.24 86.171,14.227 86.287,14.342 86.301,14.342 86.919,14.96 P6.4@87.024,14.96 ; U2.2@84.647,23.792 84.49,23.792 84.402,23.88 83.914,23.88 83.609,24.185 83.609,24.616 84.029,25.036 85.921,25.036 87.351,23.606 87.351,16.693 86.814,16.156 86.814,15.17 P6.4@86.972,15.013
D3_N: P2.9 P6.2 U1.5 | length 112
  Top Layer w0.197: P2.9@52.343,54.377 52.343,54.627 52.305,54.665 52.305,56.521 53.981,58.198 83.89,58.198 99.085,43.002 99.085,36.052 99.06,36.027 99.06,13.691 97.663,12.294 92.002,12.294 90.231,14.064 90.231,14.227 90.347,14.342 90.361,14.342 P6.2@90.979,14.96 ; P6.2@91.084,14.96 P6.2@90.979,14.96 ; U1.5@94.55,24.266 94.707,24.266 94.795,24.178 95.149,24.178 95.264,24.294 95.264,24.457 95.034,24.687 93.41,24.687 89.062,20.339 89.062,16.827 90.311,15.578 90.361,15.578 P6.2@90.979,14.96
D3_P: P2.11 P6.3 U1.4 | length 115.1
  Top Layer w0.197: P2.11@51.943,54.377 51.943,54.627 51.981,54.665 51.981,56.656 53.847,58.522 84.024,58.522 99.409,43.136 99.409,35.918 99.384,35.893 99.384,13.556 97.797,11.97 91.867,11.97 89.907,13.93 89.907,14.227 89.792,14.342 89.777,14.342 89.16,14.96 P6.3@89.054,14.96 ; P6.3@89.107,15.013 89.274,15.18 89.274,16.156 88.738,16.693 88.738,20.473 93.276,25.011 95.168,25.011 95.588,24.591 95.588,24.16 95.283,23.854 94.795,23.854 94.707,23.766 U1.4@94.55,23.766
D4_N: P2.5 P6.9 U1.1 | length 90.1
  Top Layer w0.197: P2.5@53.143,54.377 53.143,54.92 53.524,55.301 81.758,55.301 97.403,39.657 97.403,32.248 97.377,32.223 97.377,18.042 95.514,16.179 95.083,16.179 94.872,16.389 94.709,16.389 94.554,16.234 91.087,16.234 90.074,17.246 P6.9@90.074,17.5 90.18,17.5 90.797,18.118 90.812,18.118 90.927,18.233 90.927,18.531 92.815,20.418 93.54,20.418 95.198,22.076 95.198,22.239 95.083,22.354 94.795,22.354 94.707,22.266 U1.1@94.55,22.266
D4_P: P2.3 P6.8 U1.2 | length 88.7
  Top Layer w0.197: P2.3@53.543,54.377 53.543,54.862 53.658,54.977 81.624,54.977 97.079,39.522 97.079,32.383 97.053,32.357 97.053,18.176 95.38,16.503 95.217,16.503 95.101,16.618 95.101,16.781 95.147,16.827 95.147,18.174 94.554,18.767 93.117,18.767 92.104,17.754 P6.8@92.104,17.5 91.999,17.5 91.381,18.118 91.367,18.118 91.251,18.233 91.251,18.396 92.949,20.094 93.674,20.094 95.522,21.942 95.522,22.373 95.217,22.678 94.795,22.678 94.707,22.766 U1.2@94.55,22.766
D_N: P1.103 P5.2 | length 129.1
  Top Layer w0.25: P5.2@6.452,38.735 6.452,38.445 6.973,37.923 7.336,37.923 7.918,37.342 7.918,36.128 7.016,35.226 5.066,35.226 1.807,31.967 1.807,1.8 2.642,0.965 62.338,0.965 62.484,1.112 62.484,15.037 56.058,21.463 53.678,21.463 53.531,21.317 53.531,20.388 P1.103@53.543,20.377
D_P: P1.105 P5.3 | length 130.9
  Top Layer w0.25: P5.3@6.452,36.735 6.452,37.025 6.973,37.546 7.18,37.546 7.541,37.186 7.541,36.284 6.86,35.603 4.91,35.603 1.43,32.123 1.43,1.644 2.485,0.588 62.494,0.588 62.861,0.955 62.861,15.193 56.214,21.84 53.522,21.84 53.154,21.473 53.154,20.388 P1.105@53.143,20.377
EEPROM_nWP: P2.20 P12.4 | length 150.4
  Top Layer w0.152: 64.033,-1.88 64.033,20.697 71.222,27.885 71.222,44.73 67.401,48.551 67.349,48.551
  Top Layer w0.22: P2.20@50.343,51.297 50.343,49.784 51.524,48.603
  Top Layer w0.3: 51.576,48.551 67.349,48.551
  Top Layer w0.5: P12.4@4.216,13.513 3.962,13.513 2.798,12.349 2.798,9.521 3.556,8.763 7.23,8.763 8.153,7.839 v1(8.153,2.134) ; v1(8.636,-2.083) 8.839,-1.88 64.033,-1.88
  Bottom Layer w0.152: v1(8.153,2.134) 8.153,-1.6 v1(8.636,-2.083)
GLOBAL_EN: P2.99 P12.14 | length 48.3
  Top Layer w0.152: 20.574,49.352 22.606,51.384 v1(29.921,51.384) ; v1(33.553,54.331) 34.319,54.331 34.343,54.355 P2.99@34.343,54.377
  Top Layer w0.5: v1(9.652,28.956) 10.135,28.956 16.408,35.23 16.408,45.187 20.574,49.352
  Bottom Layer w0.152: v1(29.921,51.384) 29.921,51.43 32.821,54.331 v1(33.553,54.331)
  Bottom Layer w0.5: P12.14@4.216,26.213 4.216,27.377 5.313,28.473 9.169,28.473 v1(9.652,28.956)
GND: C6.1 P1.107 P1.108 P1.113 P1.114 P1.119 P1.120 P1.125 P1.126 P1.131 P1.132 P1.137 P1.138 P1.144 P1.150 P1.155 P1.156 P1.161 P1.162 P1.167 P1.168 P1.173 P1.174 P1.179 P1.180 P1.185 P1.186 P1.191 P1.192 P1.197 P1.198 P2.1 P2.2 P2.7 P2.8 P2.13 P2.14 P2.22 P2.23 P2.32 P2.33 P2.42 P2.43 P2.52 P2.53 P2.59 P2.60 P2.65 P2.66 P2.71 P2.74 P2.98 P3.6 P3.9 P3.14 P3.20 P3.25 P3.30 P3.34 P3.39 P4.2 P4.3 P5.4 P8.3 P8.5 P8.6 P8.7 P8.12 P8.13 P8.18 P8.19 P8.24 P8.25 P8.30 P8.31 P8.36 P8.37 P8.39 P9.5 P9.6 P9.11 P9.12 P9.17 P9.18 P9.19 P9.23 P9.24 P9.36 P10.2 P10.4 P10.5 P10.6 P10.9 P10.10 P10.12 P10.14 P10.15 P10.16 P10.18 P10.20 P10.21 P10.27 P10.32 P10.33 P10.34 P10.35 P10.36 P10.38 P10.39 P11.5 P11.6 P11.11 P11.12 P11.13 P11.15 P11.17 P11.18 P11.19 P11.20 P12.1 P12.3 P12.7 P12.10 P12.12 U1.3 U2.3 U3.3 U4.3 | length 132.8
  Top Layer w0.152: U3.3@10.302,24.933 10.318,24.917 v1(11.151,24.917) ; v1(34.011,50.038) 34.077,50.105 34.28,50.105 34.743,50.567 P2.98@34.743,51.297 ; P1.198@34.743,17.297 34.767,17.321 34.767,19.019 v1(34.798,19.05) 34.767,19.081 34.767,20.353 P1.197@34.743,20.377 ; P1.192@35.943,17.297 35.943,18.972 v1(35.941,18.974) v1(35.941,18.974) 35.942,20.376 P1.191@35.943,20.377 ; P1.186@37.143,17.297 37.143,18.347 v1(37.744,18.948) ; P1.185@37.143,20.377 37.143,19.55 v1(37.744,18.948) ; P1.180@38.343,17.297 38.343,18.35 v1(37.744,18.948) ; P1.179@38.343,20.377 38.343,19.547 v1(37.744,18.948) ; v1(39.009,56.484) 39.009,56.394 39.943,55.459 P2.71@39.943,54.377 ; P1.174@39.543,17.297 39.543,18.421 39.954,18.832 v1(39.954,18.898) ; P1.173@39.543,20.377 39.543,19.375 39.954,18.963 v1(39.954,18.898) ; P2.74@39.543,51.297 39.543,49.89 v1(39.548,49.886) ; P1.168@40.743,17.297 40.743,18.109 v1(39.954,18.898) ; P1.167@40.743,20.377 40.743,19.686 v1(39.954,18.898) ; P2.66@41.143,51.297 41.167,51.321 41.167,51.693 41.349,51.875 42.137,51.875 42.319,51.693 42.319,51.321 P2.60@42.343,51.297 42.343,49.707 42.636,49.414 42.963,49.414 43.38,48.997 v1(43.434,48.997) 43.943,49.506 ; v1(41.326,56.439) 40.939,56.052 40.939,55.377 41.167,55.149 41.167,53.98 41.349,53.799 42.137,53.799 42.319,53.98 42.319,54.353 P2.59@42.343,54.377 ; P1.162@41.943,17.297 41.943,18.397 v1(42.469,18.923) ; P1.161@41.943,20.377 41.943,19.449 v1(42.469,18.923) ; P1.156@43.143,17.297 43.143,18.249 v1(42.469,18.923) ; P1.155@43.143,20.377 43.143,19.597 v1(42.469,18.923) ; P2.53@43.543,54.377 43.567,54.353 43.567,53.98 43.877,53.67 45.263,53.67 45.519,53.926 ; P2.52@43.943,51.297 43.943,49.506 ; P1.150@44.343,17.297 44.343,18.13 v1(45.06,18.847) 45.543,18.363 P1.144@45.543,17.297 ; P10.20@45.314,44.679 45.314,44.425 46.33,43.409 49.378,43.409 50.394,42.393 P10.15@50.394,42.139 ; P2.43@45.543,54.377 45.567,54.353 45.567,53.98 45.877,53.67 47.209,53.67 47.519,53.98 47.519,54.353 P2.33@47.543,54.377 47.521,54.399 47.521,55.986 47.444,56.062 47.444,56.518 v1(47.422,56.54) ; P2.42@45.943,51.297 45.943,50.68 45.11,49.847 45.11,49.594 45.021,49.505 43.944,49.505 43.943,49.506 ; P1.138@46.743,17.297 46.743,18.168 v1(47.244,18.669) ; P1.137@46.743,20.377 46.743,19.17 v1(47.244,18.669) ; P1.132@47.943,17.297 47.943,17.97 v1(47.244,18.669) ; P1.131@47.943,20.377 47.943,19.368 v1(47.244,18.669) ; P2.32@47.943,51.297 47.943,50.152 v1(48.692,49.403) 49.854,49.403 49.943,49.492 P2.22@49.943,51.297 49.967,51.321 49.967,51.693 50.318,52.045 51.168,52.045 51.519,51.693 51.519,51.321 P2.14@51.543,51.297 51.543,50.719 52.131,50.13 v1(52.162,50.13) 52.187,50.155 52.543,50.155 52.743,50.355 P2.8@52.743,51.297 ; P1.126@49.143,17.297 49.143,18.282 v1(49.606,18.745) ; P1.125@49.143,20.377 49.143,19.208 v1(49.606,18.745) ; P2.23@49.543,54.377 49.567,54.353 49.567,53.98 49.749,53.799 51.337,53.799 51.519,53.98 51.519,54.353 P2.13@51.543,54.377 51.567,54.353 51.567,53.98 51.749,53.799 52.537,53.799 52.628,53.89 ; P1.120@50.343,17.297 50.343,18.008 v1(49.606,18.745) ; P1.119@50.343,20.377 50.343,19.482 v1(49.606,18.745) ; P1.114@51.543,17.297 51.543,18.294 v1(52.095,18.847) ; P1.113@51.543,20.377 51.543,19.399 v1(52.095,18.847) ; P1.108@52.743,17.297 52.743,18.199 v1(52.095,18.847) ; P2.7@52.743,54.377 52.719,54.353 52.719,53.98 52.628,53.89 ; P1.107@52.767,20.401 P1.107@52.743,20.377 52.743,19.494 v1(52.095,18.847) ; P2.1@53.919,54.151 53.919,53.98 53.737,53.799 52.719,53.799 52.628,53.89 ; v1(53.924,50.241) 53.934,50.251 53.934,51.287 P2.2@53.943,51.297 ; P2.1@53.943,54.377 53.943,54.175 53.967,54.151 54.568,54.151 54.694,54.026 v1(54.788,54.026) ; v1(60.96,65.049) 61.054,65.049 61.293,65.288 U4.3@62.22,65.288 ; v1(82.804,23.343) 82.829,23.317 84.622,23.317 U2.3@84.647,23.292
  Top Layer w0.3: U1.3@93.715,23.266 U1.3@94.55,23.266 94.575,23.241 96.012,23.241 v1(96.037,23.216)
  Top Layer w0.35: P10.32@30.074,44.679 30.074,44.933 31.547,46.406 v1(34.112,46.406)
  Top Layer w0.352: U2.3@84.647,23.292 U2.3@85.482,23.292
  Top Layer w0.5: P10.33@27.534,41.608 P10.33@27.534,42.139 ; P10.27@35.154,42.139 35.604,41.689 35.858,41.689 P11.12@38.608,38.938 ; P10.20@45.314,44.679 P10.18@47.854,44.679
  Top Layer w1.016: P12.10@4.216,21.133 P12.12@4.216,23.673 ; P9.19@43.84,27.711 P9.17@46.38,27.711
GND_T: C1.1 C3.1 C5.2 P6.14 P6.16 P7.3 P7.4 | length 31.7
  Top Layer w0.5: C5.2@67.589,5.279 67.589,3.454 69.012,2.032 v1(71.806,2.032) 71.806,0.813 73.101,-0.483 P7.3@73.101,-0.737 ; C3.1@76.378,9.243 C1.1@76.378,7.696 76.528,7.846 76.817,7.846 76.871,7.899 82.404,7.899 P6.14@82.454,7.95 P6.16@82.454,6.4
  Bottom Layer w0.5: v1(71.806,2.032) 75.159,2.032 79.527,6.4 P6.16@82.454,6.4
GPIO2: P2.58 P3.3 | length 40
  Top Layer w0.152: 23.034,52.049 29.843,52.049 29.847,52.045 31.937,52.045 32.165,52.273 39.767,52.273 39.992,52.049 v1(40.03,52.049) ; P2.58@42.743,51.297 42.767,51.273 42.767,50.716 43.18,50.303 v1(43.18,50.241)
  Top Layer w0.3: P3.3@10.541,64.541 23.034,52.049
  Bottom Layer w0.152: v1(40.03,52.049) 41.896,50.183 43.122,50.183 v1(43.18,50.241)
  other v1: 31.902,52.045
GPIO3: P2.56 P3.5 | length 37.1
  Top Layer w0.152: 23.15,52.577 40.407,52.577 40.705,52.279 42.93,52.279 43.119,52.09 43.119,51.321 P2.56@43.143,51.297
  Top Layer w0.3: P3.5@13.081,64.541 18.679,58.943 18.679,57.048 23.15,52.577
GPIO4: P2.54 P3.7 | length 36.1
  Top Layer w0.152: 23.535,52.955 23.609,52.881 31.879,52.881 40.533,52.881 40.831,52.583 43.056,52.583 43.543,52.096 P2.54@43.543,51.297
  Top Layer w0.3: P3.7@15.621,64.541 19.131,61.031 19.131,57.235 23.411,52.955 23.535,52.955
GPIO5: P2.34 P3.29 | length 15
  Top Layer w0.152: v1(47.346,52.654) 47.401,52.599 47.401,52.1 47.543,51.958 P2.34@47.543,51.297
  Bottom Layer w0.152: P3.29@43.561,64.541 43.561,59.244 47.473,55.333 47.473,53.179 47.412,53.119 47.412,52.721 v1(47.346,52.654)
GPIO6: P2.30 P3.31 | length 19.4
  Top Layer w0.152: P2.30@48.343,51.297 48.343,50.768 48.514,50.597 48.952,50.597 49.359,50.19 v1(49.434,50.19)
  Bottom Layer w0.152: P3.31@46.101,64.541 44.013,62.453 44.013,59.222 47.329,55.906 47.544,55.906 47.933,55.517 47.978,55.472 47.978,55.403 47.887,53.291 ccw(c48.514,53.264) 47.887,53.224 47.981,51.74 48.025,51.695 49.434,50.287 v1(49.434,50.19)
GPIO7: P2.37 P3.26 | length 18.6
  Top Layer w0.152: 46.683,55.915 46.743,55.855 P2.37@46.743,54.377
  Top Layer w0.25: P3.26@38.481,67.081 37.382,65.982 37.382,62.622 38.688,61.316 41.282,61.316 46.683,55.915
GPIO8: P2.39 P3.24 | length 18.5
  Top Layer w0.152: P2.39@46.343,54.377 46.343,55.536
  Top Layer w0.25: P3.24@35.941,67.081 35.941,66.827 36.97,65.798 36.98,65.741 36.98,62.385 37.053,62.311 38.501,60.864 41.016,60.864 46.343,55.536
GPIO9: P2.40 P3.21 | length 22.8
  Top Layer w0.152: v1(45.771,49.657) 46.343,50.229 P2.40@46.343,51.297
  Bottom Layer w0.25: P3.21@33.401,64.541 34.696,64.541 34.843,64.395 34.933,64.035 ccw(c35.941,64.287) 35.896,63.249 37.31,61.963 37.318,61.955 45.436,53.837 45.436,51.878 45.771,51.542 v1(45.771,49.657)